# Altium PCB ProPrj_HTXStudio_OneHanded_Keyboard(1).PcbDoc (part 5 of 11)
Units mm, origin at the board's own origin, x right, y up, seen from the top; angles counter-clockwise.
Board outline 152.4 x 101.6 mm, 20 copper layers (F.Cu, F.Mask, B.Cu, B.Mask, In1.Cu, F.SilkS, In2.Cu, B.SilkS, F.Adhes, B.Adhes, F.Paste, B.Paste, Dwgs.User, Cmts.User, Eco1.User, Eco2.User, Edge.Cuts, Margin, B.CrtYd, F.CrtYd); 269 components, 0 nets, 747 pads, 1168 vias.
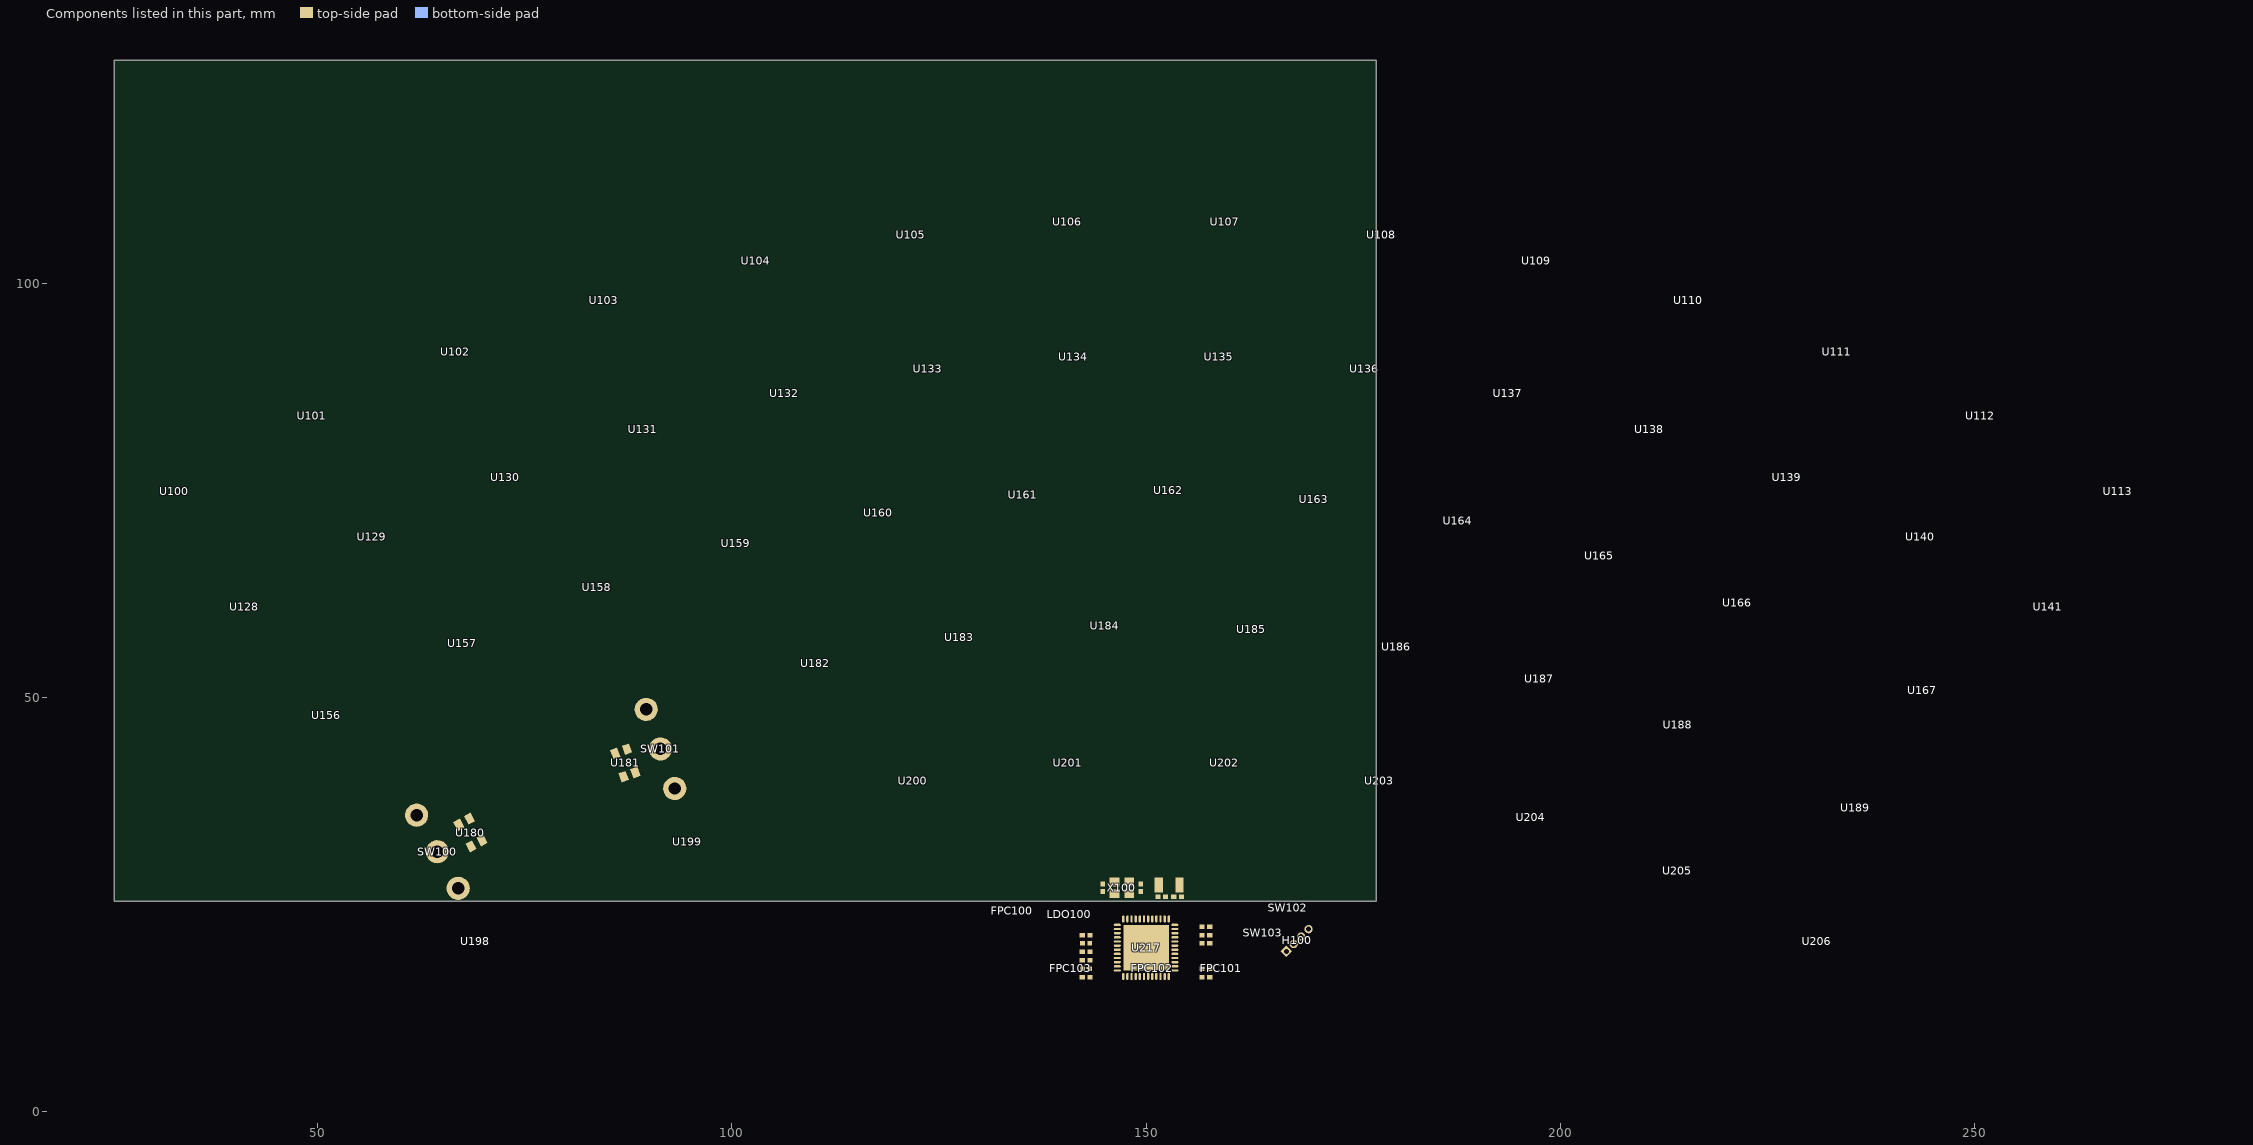
[diagram p17: the components of this part, seen from the top]

## Design rules (kind name [scope] priority, off if disabled: settings) (continued)
PolygonConnect Polygon_B.Cu--90_ConnectRelief90 [IsNamedPolygon('B.Cu--90') vs (IsThruPin or IsSMTPin) and (PadShape_AllLayers <> 'Round')] p804: connectstyle=Relief reliefconductorwidth=0.254 reliefentries=4 polygonreliefangle="90 Angle" airgapwidth=0.254
PolygonConnect Polygon_B.Cu--89_ConnectDirect [IsNamedPolygon('B.Cu--89') vs IsVia] p805: connectstyle=Direct reliefconductorwidth=0.254 reliefentries=4 polygonreliefangle="90 Angle" airgapwidth=0.254
PolygonConnect Polygon_B.Cu--89_ConnectRelief45 [IsNamedPolygon('B.Cu--89') vs (IsThruPin or IsSMTPin) and (PadShape_AllLayers = 'Round')] p806: connectstyle=Relief reliefconductorwidth=0.254 reliefentries=4 polygonreliefangle="45 Angle" airgapwidth=0.254
PolygonConnect Polygon_B.Cu--89_ConnectRelief90 [IsNamedPolygon('B.Cu--89') vs (IsThruPin or IsSMTPin) and (PadShape_AllLayers <> 'Round')] p807: connectstyle=Relief reliefconductorwidth=0.254 reliefentries=4 polygonreliefangle="90 Angle" airgapwidth=0.254
PolygonConnect Polygon_B.Cu--88_ConnectDirect [IsNamedPolygon('B.Cu--88') vs IsVia] p808: connectstyle=Direct reliefconductorwidth=0.254 reliefentries=4 polygonreliefangle="90 Angle" airgapwidth=0.254
PolygonConnect Polygon_B.Cu--88_ConnectRelief45 [IsNamedPolygon('B.Cu--88') vs (IsThruPin or IsSMTPin) and (PadShape_AllLayers = 'Round')] p809: connectstyle=Relief reliefconductorwidth=0.254 reliefentries=4 polygonreliefangle="45 Angle" airgapwidth=0.254
PolygonConnect Polygon_B.Cu--88_ConnectRelief90 [IsNamedPolygon('B.Cu--88') vs (IsThruPin or IsSMTPin) and (PadShape_AllLayers <> 'Round')] p810: connectstyle=Relief reliefconductorwidth=0.254 reliefentries=4 polygonreliefangle="90 Angle" airgapwidth=0.254
PolygonConnect Polygon_B.Cu--87_ConnectDirect [IsNamedPolygon('B.Cu--87') vs IsVia] p811: connectstyle=Direct reliefconductorwidth=0.254 reliefentries=4 polygonreliefangle="90 Angle" airgapwidth=0.254
PolygonConnect Polygon_B.Cu--87_ConnectRelief45 [IsNamedPolygon('B.Cu--87') vs (IsThruPin or IsSMTPin) and (PadShape_AllLayers = 'Round')] p812: connectstyle=Relief reliefconductorwidth=0.254 reliefentries=4 polygonreliefangle="45 Angle" airgapwidth=0.254
PolygonConnect Polygon_B.Cu--87_ConnectRelief90 [IsNamedPolygon('B.Cu--87') vs (IsThruPin or IsSMTPin) and (PadShape_AllLayers <> 'Round')] p813: connectstyle=Relief reliefconductorwidth=0.254 reliefentries=4 polygonreliefangle="90 Angle" airgapwidth=0.254
PolygonConnect Polygon_B.Cu--86_ConnectDirect [IsNamedPolygon('B.Cu--86') vs IsVia] p814: connectstyle=Direct reliefconductorwidth=0.254 reliefentries=4 polygonreliefangle="90 Angle" airgapwidth=0.254
PolygonConnect Polygon_B.Cu--86_ConnectRelief45 [IsNamedPolygon('B.Cu--86') vs (IsThruPin or IsSMTPin) and (PadShape_AllLayers = 'Round')] p815: connectstyle=Relief reliefconductorwidth=0.254 reliefentries=4 polygonreliefangle="45 Angle" airgapwidth=0.254
PolygonConnect Polygon_B.Cu--86_ConnectRelief90 [IsNamedPolygon('B.Cu--86') vs (IsThruPin or IsSMTPin) and (PadShape_AllLayers <> 'Round')] p816: connectstyle=Relief reliefconductorwidth=0.254 reliefentries=4 polygonreliefangle="90 Angle" airgapwidth=0.254
PolygonConnect Polygon_B.Cu--85_ConnectDirect [IsNamedPolygon('B.Cu--85') vs IsVia] p817: connectstyle=Direct reliefconductorwidth=0.254 reliefentries=4 polygonreliefangle="90 Angle" airgapwidth=0.254
PolygonConnect Polygon_B.Cu--85_ConnectRelief45 [IsNamedPolygon('B.Cu--85') vs (IsThruPin or IsSMTPin) and (PadShape_AllLayers = 'Round')] p818: connectstyle=Relief reliefconductorwidth=0.254 reliefentries=4 polygonreliefangle="45 Angle" airgapwidth=0.254
PolygonConnect Polygon_B.Cu--85_ConnectRelief90 [IsNamedPolygon('B.Cu--85') vs (IsThruPin or IsSMTPin) and (PadShape_AllLayers <> 'Round')] p819: connectstyle=Relief reliefconductorwidth=0.254 reliefentries=4 polygonreliefangle="90 Angle" airgapwidth=0.254
PolygonConnect Polygon_B.Cu--84_ConnectDirect [IsNamedPolygon('B.Cu--84') vs IsVia] p820: connectstyle=Direct reliefconductorwidth=0.254 reliefentries=4 polygonreliefangle="90 Angle" airgapwidth=0.254
PolygonConnect Polygon_B.Cu--84_ConnectRelief45 [IsNamedPolygon('B.Cu--84') vs (IsThruPin or IsSMTPin) and (PadShape_AllLayers = 'Round')] p821: connectstyle=Relief reliefconductorwidth=0.254 reliefentries=4 polygonreliefangle="45 Angle" airgapwidth=0.254
PolygonConnect Polygon_B.Cu--84_ConnectRelief90 [IsNamedPolygon('B.Cu--84') vs (IsThruPin or IsSMTPin) and (PadShape_AllLayers <> 'Round')] p822: connectstyle=Relief reliefconductorwidth=0.254 reliefentries=4 polygonreliefangle="90 Angle" airgapwidth=0.254
PolygonConnect Polygon_B.Cu--83_ConnectDirect [IsNamedPolygon('B.Cu--83') vs IsVia] p823: connectstyle=Direct reliefconductorwidth=0.254 reliefentries=4 polygonreliefangle="90 Angle" airgapwidth=0.254
PolygonConnect Polygon_B.Cu--83_ConnectRelief45 [IsNamedPolygon('B.Cu--83') vs (IsThruPin or IsSMTPin) and (PadShape_AllLayers = 'Round')] p824: connectstyle=Relief reliefconductorwidth=0.254 reliefentries=4 polygonreliefangle="45 Angle" airgapwidth=0.254
PolygonConnect Polygon_B.Cu--83_ConnectRelief90 [IsNamedPolygon('B.Cu--83') vs (IsThruPin or IsSMTPin) and (PadShape_AllLayers <> 'Round')] p825: connectstyle=Relief reliefconductorwidth=0.254 reliefentries=4 polygonreliefangle="90 Angle" airgapwidth=0.254
PolygonConnect Polygon_B.Cu--82_ConnectDirect [IsNamedPolygon('B.Cu--82') vs IsVia] p826: connectstyle=Direct reliefconductorwidth=0.254 reliefentries=4 polygonreliefangle="90 Angle" airgapwidth=0.254
PolygonConnect Polygon_B.Cu--82_ConnectRelief45 [IsNamedPolygon('B.Cu--82') vs (IsThruPin or IsSMTPin) and (PadShape_AllLayers = 'Round')] p827: connectstyle=Relief reliefconductorwidth=0.254 reliefentries=4 polygonreliefangle="45 Angle" airgapwidth=0.254
PolygonConnect Polygon_B.Cu--82_ConnectRelief90 [IsNamedPolygon('B.Cu--82') vs (IsThruPin or IsSMTPin) and (PadShape_AllLayers <> 'Round')] p828: connectstyle=Relief reliefconductorwidth=0.254 reliefentries=4 polygonreliefangle="90 Angle" airgapwidth=0.254
PolygonConnect Polygon_B.Cu--81_ConnectDirect [IsNamedPolygon('B.Cu--81') vs IsVia] p829: connectstyle=Direct reliefconductorwidth=0.254 reliefentries=4 polygonreliefangle="90 Angle" airgapwidth=0.254
PolygonConnect Polygon_B.Cu--81_ConnectRelief45 [IsNamedPolygon('B.Cu--81') vs (IsThruPin or IsSMTPin) and (PadShape_AllLayers = 'Round')] p830: connectstyle=Relief reliefconductorwidth=0.254 reliefentries=4 polygonreliefangle="45 Angle" airgapwidth=0.254
PolygonConnect Polygon_B.Cu--81_ConnectRelief90 [IsNamedPolygon('B.Cu--81') vs (IsThruPin or IsSMTPin) and (PadShape_AllLayers <> 'Round')] p831: connectstyle=Relief reliefconductorwidth=0.254 reliefentries=4 polygonreliefangle="90 Angle" airgapwidth=0.254
PolygonConnect Polygon_B.Cu--80_ConnectDirect [IsNamedPolygon('B.Cu--80') vs IsVia] p832: connectstyle=Direct reliefconductorwidth=0.254 reliefentries=4 polygonreliefangle="90 Angle" airgapwidth=0.254
PolygonConnect Polygon_B.Cu--80_ConnectRelief45 [IsNamedPolygon('B.Cu--80') vs (IsThruPin or IsSMTPin) and (PadShape_AllLayers = 'Round')] p833: connectstyle=Relief reliefconductorwidth=0.254 reliefentries=4 polygonreliefangle="45 Angle" airgapwidth=0.254
PolygonConnect Polygon_B.Cu--80_ConnectRelief90 [IsNamedPolygon('B.Cu--80') vs (IsThruPin or IsSMTPin) and (PadShape_AllLayers <> 'Round')] p834: connectstyle=Relief reliefconductorwidth=0.254 reliefentries=4 polygonreliefangle="90 Angle" airgapwidth=0.254
PolygonConnect Polygon_B.Cu--79_ConnectDirect [IsNamedPolygon('B.Cu--79') vs IsVia] p835: connectstyle=Direct reliefconductorwidth=0.254 reliefentries=4 polygonreliefangle="90 Angle" airgapwidth=0.254
PolygonConnect Polygon_B.Cu--79_ConnectRelief45 [IsNamedPolygon('B.Cu--79') vs (IsThruPin or IsSMTPin) and (PadShape_AllLayers = 'Round')] p836: connectstyle=Relief reliefconductorwidth=0.254 reliefentries=4 polygonreliefangle="45 Angle" airgapwidth=0.254
PolygonConnect Polygon_B.Cu--79_ConnectRelief90 [IsNamedPolygon('B.Cu--79') vs (IsThruPin or IsSMTPin) and (PadShape_AllLayers <> 'Round')] p837: connectstyle=Relief reliefconductorwidth=0.254 reliefentries=4 polygonreliefangle="90 Angle" airgapwidth=0.254
PolygonConnect Polygon_B.Cu--78_ConnectDirect [IsNamedPolygon('B.Cu--78') vs IsVia] p838: connectstyle=Direct reliefconductorwidth=0.254 reliefentries=4 polygonreliefangle="90 Angle" airgapwidth=0.254
PolygonConnect Polygon_B.Cu--78_ConnectRelief45 [IsNamedPolygon('B.Cu--78') vs (IsThruPin or IsSMTPin) and (PadShape_AllLayers = 'Round')] p839: connectstyle=Relief reliefconductorwidth=0.254 reliefentries=4 polygonreliefangle="45 Angle" airgapwidth=0.254
PolygonConnect Polygon_B.Cu--78_ConnectRelief90 [IsNamedPolygon('B.Cu--78') vs (IsThruPin or IsSMTPin) and (PadShape_AllLayers <> 'Round')] p840: connectstyle=Relief reliefconductorwidth=0.254 reliefentries=4 polygonreliefangle="90 Angle" airgapwidth=0.254
PolygonConnect Polygon_B.Cu--77_ConnectDirect [IsNamedPolygon('B.Cu--77') vs IsVia] p841: connectstyle=Direct reliefconductorwidth=0.254 reliefentries=4 polygonreliefangle="90 Angle" airgapwidth=0.254
PolygonConnect Polygon_B.Cu--77_ConnectRelief45 [IsNamedPolygon('B.Cu--77') vs (IsThruPin or IsSMTPin) and (PadShape_AllLayers = 'Round')] p842: connectstyle=Relief reliefconductorwidth=0.254 reliefentries=4 polygonreliefangle="45 Angle" airgapwidth=0.254
PolygonConnect Polygon_B.Cu--77_ConnectRelief90 [IsNamedPolygon('B.Cu--77') vs (IsThruPin or IsSMTPin) and (PadShape_AllLayers <> 'Round')] p843: connectstyle=Relief reliefconductorwidth=0.254 reliefentries=4 polygonreliefangle="90 Angle" airgapwidth=0.254
PolygonConnect Polygon_B.Cu--76_ConnectDirect [IsNamedPolygon('B.Cu--76') vs IsVia] p844: connectstyle=Direct reliefconductorwidth=0.254 reliefentries=4 polygonreliefangle="90 Angle" airgapwidth=0.254
PolygonConnect Polygon_B.Cu--76_ConnectRelief45 [IsNamedPolygon('B.Cu--76') vs (IsThruPin or IsSMTPin) and (PadShape_AllLayers = 'Round')] p845: connectstyle=Relief reliefconductorwidth=0.254 reliefentries=4 polygonreliefangle="45 Angle" airgapwidth=0.254
PolygonConnect Polygon_B.Cu--76_ConnectRelief90 [IsNamedPolygon('B.Cu--76') vs (IsThruPin or IsSMTPin) and (PadShape_AllLayers <> 'Round')] p846: connectstyle=Relief reliefconductorwidth=0.254 reliefentries=4 polygonreliefangle="90 Angle" airgapwidth=0.254
PolygonConnect Polygon_B.Cu--75_ConnectDirect [IsNamedPolygon('B.Cu--75') vs IsVia] p847: connectstyle=Direct reliefconductorwidth=0.254 reliefentries=4 polygonreliefangle="90 Angle" airgapwidth=0.254
PolygonConnect Polygon_B.Cu--75_ConnectRelief45 [IsNamedPolygon('B.Cu--75') vs (IsThruPin or IsSMTPin) and (PadShape_AllLayers = 'Round')] p848: connectstyle=Relief reliefconductorwidth=0.254 reliefentries=4 polygonreliefangle="45 Angle" airgapwidth=0.254
PolygonConnect Polygon_B.Cu--75_ConnectRelief90 [IsNamedPolygon('B.Cu--75') vs (IsThruPin or IsSMTPin) and (PadShape_AllLayers <> 'Round')] p849: connectstyle=Relief reliefconductorwidth=0.254 reliefentries=4 polygonreliefangle="90 Angle" airgapwidth=0.254
PolygonConnect Polygon_B.Cu--74_ConnectDirect [IsNamedPolygon('B.Cu--74') vs IsVia] p850: connectstyle=Direct reliefconductorwidth=0.254 reliefentries=4 polygonreliefangle="90 Angle" airgapwidth=0.254
PolygonConnect Polygon_B.Cu--74_ConnectRelief45 [IsNamedPolygon('B.Cu--74') vs (IsThruPin or IsSMTPin) and (PadShape_AllLayers = 'Round')] p851: connectstyle=Relief reliefconductorwidth=0.254 reliefentries=4 polygonreliefangle="45 Angle" airgapwidth=0.254
PolygonConnect Polygon_B.Cu--74_ConnectRelief90 [IsNamedPolygon('B.Cu--74') vs (IsThruPin or IsSMTPin) and (PadShape_AllLayers <> 'Round')] p852: connectstyle=Relief reliefconductorwidth=0.254 reliefentries=4 polygonreliefangle="90 Angle" airgapwidth=0.254
PolygonConnect Polygon_B.Cu--73_ConnectDirect [IsNamedPolygon('B.Cu--73') vs IsVia] p853: connectstyle=Direct reliefconductorwidth=0.254 reliefentries=4 polygonreliefangle="90 Angle" airgapwidth=0.254
PolygonConnect Polygon_B.Cu--73_ConnectRelief45 [IsNamedPolygon('B.Cu--73') vs (IsThruPin or IsSMTPin) and (PadShape_AllLayers = 'Round')] p854: connectstyle=Relief reliefconductorwidth=0.254 reliefentries=4 polygonreliefangle="45 Angle" airgapwidth=0.254
PolygonConnect Polygon_B.Cu--73_ConnectRelief90 [IsNamedPolygon('B.Cu--73') vs (IsThruPin or IsSMTPin) and (PadShape_AllLayers <> 'Round')] p855: connectstyle=Relief reliefconductorwidth=0.254 reliefentries=4 polygonreliefangle="90 Angle" airgapwidth=0.254
PolygonConnect Polygon_B.Cu--72_ConnectDirect [IsNamedPolygon('B.Cu--72') vs IsVia] p856: connectstyle=Direct reliefconductorwidth=0.254 reliefentries=4 polygonreliefangle="90 Angle" airgapwidth=0.254
PolygonConnect Polygon_B.Cu--72_ConnectRelief45 [IsNamedPolygon('B.Cu--72') vs (IsThruPin or IsSMTPin) and (PadShape_AllLayers = 'Round')] p857: connectstyle=Relief reliefconductorwidth=0.254 reliefentries=4 polygonreliefangle="45 Angle" airgapwidth=0.254
PolygonConnect Polygon_B.Cu--72_ConnectRelief90 [IsNamedPolygon('B.Cu--72') vs (IsThruPin or IsSMTPin) and (PadShape_AllLayers <> 'Round')] p858: connectstyle=Relief reliefconductorwidth=0.254 reliefentries=4 polygonreliefangle="90 Angle" airgapwidth=0.254
PolygonConnect Polygon_B.Cu--71_ConnectDirect [IsNamedPolygon('B.Cu--71') vs IsVia] p859: connectstyle=Direct reliefconductorwidth=0.254 reliefentries=4 polygonreliefangle="90 Angle" airgapwidth=0.254
PolygonConnect Polygon_B.Cu--71_ConnectRelief45 [IsNamedPolygon('B.Cu--71') vs (IsThruPin or IsSMTPin) and (PadShape_AllLayers = 'Round')] p860: connectstyle=Relief reliefconductorwidth=0.254 reliefentries=4 polygonreliefangle="45 Angle" airgapwidth=0.254
PolygonConnect Polygon_B.Cu--71_ConnectRelief90 [IsNamedPolygon('B.Cu--71') vs (IsThruPin or IsSMTPin) and (PadShape_AllLayers <> 'Round')] p861: connectstyle=Relief reliefconductorwidth=0.254 reliefentries=4 polygonreliefangle="90 Angle" airgapwidth=0.254
PolygonConnect Polygon_B.Cu--70_ConnectDirect [IsNamedPolygon('B.Cu--70') vs IsVia] p862: connectstyle=Direct reliefconductorwidth=0.254 reliefentries=4 polygonreliefangle="90 Angle" airgapwidth=0.254
PolygonConnect Polygon_B.Cu--70_ConnectRelief45 [IsNamedPolygon('B.Cu--70') vs (IsThruPin or IsSMTPin) and (PadShape_AllLayers = 'Round')] p863: connectstyle=Relief reliefconductorwidth=0.254 reliefentries=4 polygonreliefangle="45 Angle" airgapwidth=0.254
PolygonConnect Polygon_B.Cu--70_ConnectRelief90 [IsNamedPolygon('B.Cu--70') vs (IsThruPin or IsSMTPin) and (PadShape_AllLayers <> 'Round')] p864: connectstyle=Relief reliefconductorwidth=0.254 reliefentries=4 polygonreliefangle="90 Angle" airgapwidth=0.254
PolygonConnect Polygon_B.Cu--69_ConnectDirect [IsNamedPolygon('B.Cu--69') vs IsVia] p865: connectstyle=Direct reliefconductorwidth=0.254 reliefentries=4 polygonreliefangle="90 Angle" airgapwidth=0.254
PolygonConnect Polygon_B.Cu--69_ConnectRelief45 [IsNamedPolygon('B.Cu--69') vs (IsThruPin or IsSMTPin) and (PadShape_AllLayers = 'Round')] p866: connectstyle=Relief reliefconductorwidth=0.254 reliefentries=4 polygonreliefangle="45 Angle" airgapwidth=0.254
PolygonConnect Polygon_B.Cu--69_ConnectRelief90 [IsNamedPolygon('B.Cu--69') vs (IsThruPin or IsSMTPin) and (PadShape_AllLayers <> 'Round')] p867: connectstyle=Relief reliefconductorwidth=0.254 reliefentries=4 polygonreliefangle="90 Angle" airgapwidth=0.254
PolygonConnect Polygon_B.Cu--68_ConnectDirect [IsNamedPolygon('B.Cu--68') vs IsVia] p868: connectstyle=Direct reliefconductorwidth=0.254 reliefentries=4 polygonreliefangle="90 Angle" airgapwidth=0.254
PolygonConnect Polygon_B.Cu--68_ConnectRelief45 [IsNamedPolygon('B.Cu--68') vs (IsThruPin or IsSMTPin) and (PadShape_AllLayers = 'Round')] p869: connectstyle=Relief reliefconductorwidth=0.254 reliefentries=4 polygonreliefangle="45 Angle" airgapwidth=0.254
PolygonConnect Polygon_B.Cu--68_ConnectRelief90 [IsNamedPolygon('B.Cu--68') vs (IsThruPin or IsSMTPin) and (PadShape_AllLayers <> 'Round')] p870: connectstyle=Relief reliefconductorwidth=0.254 reliefentries=4 polygonreliefangle="90 Angle" airgapwidth=0.254
PolygonConnect Polygon_B.Cu--67_ConnectDirect [IsNamedPolygon('B.Cu--67') vs IsVia] p871: connectstyle=Direct reliefconductorwidth=0.254 reliefentries=4 polygonreliefangle="90 Angle" airgapwidth=0.254
PolygonConnect Polygon_B.Cu--67_ConnectRelief45 [IsNamedPolygon('B.Cu--67') vs (IsThruPin or IsSMTPin) and (PadShape_AllLayers = 'Round')] p872: connectstyle=Relief reliefconductorwidth=0.254 reliefentries=4 polygonreliefangle="45 Angle" airgapwidth=0.254
PolygonConnect Polygon_B.Cu--67_ConnectRelief90 [IsNamedPolygon('B.Cu--67') vs (IsThruPin or IsSMTPin) and (PadShape_AllLayers <> 'Round')] p873: connectstyle=Relief reliefconductorwidth=0.254 reliefentries=4 polygonreliefangle="90 Angle" airgapwidth=0.254
PolygonConnect Polygon_B.Cu--66_ConnectDirect [IsNamedPolygon('B.Cu--66') vs IsVia] p874: connectstyle=Direct reliefconductorwidth=0.254 reliefentries=4 polygonreliefangle="90 Angle" airgapwidth=0.254
PolygonConnect Polygon_B.Cu--66_ConnectRelief45 [IsNamedPolygon('B.Cu--66') vs (IsThruPin or IsSMTPin) and (PadShape_AllLayers = 'Round')] p875: connectstyle=Relief reliefconductorwidth=0.254 reliefentries=4 polygonreliefangle="45 Angle" airgapwidth=0.254
PolygonConnect Polygon_B.Cu--66_ConnectRelief90 [IsNamedPolygon('B.Cu--66') vs (IsThruPin or IsSMTPin) and (PadShape_AllLayers <> 'Round')] p876: connectstyle=Relief reliefconductorwidth=0.254 reliefentries=4 polygonreliefangle="90 Angle" airgapwidth=0.254
PolygonConnect Polygon_B.Cu--65_ConnectDirect [IsNamedPolygon('B.Cu--65') vs IsVia] p877: connectstyle=Direct reliefconductorwidth=0.254 reliefentries=4 polygonreliefangle="90 Angle" airgapwidth=0.254
PolygonConnect Polygon_B.Cu--65_ConnectRelief45 [IsNamedPolygon('B.Cu--65') vs (IsThruPin or IsSMTPin) and (PadShape_AllLayers = 'Round')] p878: connectstyle=Relief reliefconductorwidth=0.254 reliefentries=4 polygonreliefangle="45 Angle" airgapwidth=0.254
PolygonConnect Polygon_B.Cu--65_ConnectRelief90 [IsNamedPolygon('B.Cu--65') vs (IsThruPin or IsSMTPin) and (PadShape_AllLayers <> 'Round')] p879: connectstyle=Relief reliefconductorwidth=0.254 reliefentries=4 polygonreliefangle="90 Angle" airgapwidth=0.254
PolygonConnect Polygon_B.Cu--64_ConnectDirect [IsNamedPolygon('B.Cu--64') vs IsVia] p880: connectstyle=Direct reliefconductorwidth=0.254 reliefentries=4 polygonreliefangle="90 Angle" airgapwidth=0.254
PolygonConnect Polygon_B.Cu--64_ConnectRelief45 [IsNamedPolygon('B.Cu--64') vs (IsThruPin or IsSMTPin) and (PadShape_AllLayers = 'Round')] p881: connectstyle=Relief reliefconductorwidth=0.254 reliefentries=4 polygonreliefangle="45 Angle" airgapwidth=0.254
PolygonConnect Polygon_B.Cu--64_ConnectRelief90 [IsNamedPolygon('B.Cu--64') vs (IsThruPin or IsSMTPin) and (PadShape_AllLayers <> 'Round')] p882: connectstyle=Relief reliefconductorwidth=0.254 reliefentries=4 polygonreliefangle="90 Angle" airgapwidth=0.254
PolygonConnect Polygon_B.Cu--63_ConnectDirect [IsNamedPolygon('B.Cu--63') vs IsVia] p883: connectstyle=Direct reliefconductorwidth=0.254 reliefentries=4 polygonreliefangle="90 Angle" airgapwidth=0.254
PolygonConnect Polygon_B.Cu--63_ConnectRelief45 [IsNamedPolygon('B.Cu--63') vs (IsThruPin or IsSMTPin) and (PadShape_AllLayers = 'Round')] p884: connectstyle=Relief reliefconductorwidth=0.254 reliefentries=4 polygonreliefangle="45 Angle" airgapwidth=0.254
PolygonConnect Polygon_B.Cu--63_ConnectRelief90 [IsNamedPolygon('B.Cu--63') vs (IsThruPin or IsSMTPin) and (PadShape_AllLayers <> 'Round')] p885: connectstyle=Relief reliefconductorwidth=0.254 reliefentries=4 polygonreliefangle="90 Angle" airgapwidth=0.254
PolygonConnect Polygon_B.Cu--62_ConnectDirect [IsNamedPolygon('B.Cu--62') vs IsVia] p886: connectstyle=Direct reliefconductorwidth=0.254 reliefentries=4 polygonreliefangle="90 Angle" airgapwidth=0.254
PolygonConnect Polygon_B.Cu--62_ConnectRelief45 [IsNamedPolygon('B.Cu--62') vs (IsThruPin or IsSMTPin) and (PadShape_AllLayers = 'Round')] p887: connectstyle=Relief reliefconductorwidth=0.254 reliefentries=4 polygonreliefangle="45 Angle" airgapwidth=0.254
PolygonConnect Polygon_B.Cu--62_ConnectRelief90 [IsNamedPolygon('B.Cu--62') vs (IsThruPin or IsSMTPin) and (PadShape_AllLayers <> 'Round')] p888: connectstyle=Relief reliefconductorwidth=0.254 reliefentries=4 polygonreliefangle="90 Angle" airgapwidth=0.254
PolygonConnect Polygon_B.Cu--61_ConnectDirect [IsNamedPolygon('B.Cu--61') vs IsVia] p889: connectstyle=Direct reliefconductorwidth=0.254 reliefentries=4 polygonreliefangle="90 Angle" airgapwidth=0.254
PolygonConnect Polygon_B.Cu--61_ConnectRelief45 [IsNamedPolygon('B.Cu--61') vs (IsThruPin or IsSMTPin) and (PadShape_AllLayers = 'Round')] p890: connectstyle=Relief reliefconductorwidth=0.254 reliefentries=4 polygonreliefangle="45 Angle" airgapwidth=0.254
PolygonConnect Polygon_B.Cu--61_ConnectRelief90 [IsNamedPolygon('B.Cu--61') vs (IsThruPin or IsSMTPin) and (PadShape_AllLayers <> 'Round')] p891: connectstyle=Relief reliefconductorwidth=0.254 reliefentries=4 polygonreliefangle="90 Angle" airgapwidth=0.254
PolygonConnect Polygon_B.Cu--60_ConnectDirect [IsNamedPolygon('B.Cu--60') vs IsVia] p892: connectstyle=Direct reliefconductorwidth=0.254 reliefentries=4 polygonreliefangle="90 Angle" airgapwidth=0.254
PolygonConnect Polygon_B.Cu--60_ConnectRelief45 [IsNamedPolygon('B.Cu--60') vs (IsThruPin or IsSMTPin) and (PadShape_AllLayers = 'Round')] p893: connectstyle=Relief reliefconductorwidth=0.254 reliefentries=4 polygonreliefangle="45 Angle" airgapwidth=0.254
PolygonConnect Polygon_B.Cu--60_ConnectRelief90 [IsNamedPolygon('B.Cu--60') vs (IsThruPin or IsSMTPin) and (PadShape_AllLayers <> 'Round')] p894: connectstyle=Relief reliefconductorwidth=0.254 reliefentries=4 polygonreliefangle="90 Angle" airgapwidth=0.254
PolygonConnect Polygon_B.Cu--59_ConnectDirect [IsNamedPolygon('B.Cu--59') vs IsVia] p895: connectstyle=Direct reliefconductorwidth=0.254 reliefentries=4 polygonreliefangle="90 Angle" airgapwidth=0.254
PolygonConnect Polygon_B.Cu--59_ConnectRelief45 [IsNamedPolygon('B.Cu--59') vs (IsThruPin or IsSMTPin) and (PadShape_AllLayers = 'Round')] p896: connectstyle=Relief reliefconductorwidth=0.254 reliefentries=4 polygonreliefangle="45 Angle" airgapwidth=0.254
PolygonConnect Polygon_B.Cu--59_ConnectRelief90 [IsNamedPolygon('B.Cu--59') vs (IsThruPin or IsSMTPin) and (PadShape_AllLayers <> 'Round')] p897: connectstyle=Relief reliefconductorwidth=0.254 reliefentries=4 polygonreliefangle="90 Angle" airgapwidth=0.254
PolygonConnect Polygon_B.Cu--58_ConnectDirect [IsNamedPolygon('B.Cu--58') vs IsVia] p898: connectstyle=Direct reliefconductorwidth=0.254 reliefentries=4 polygonreliefangle="90 Angle" airgapwidth=0.254
PolygonConnect Polygon_B.Cu--58_ConnectRelief45 [IsNamedPolygon('B.Cu--58') vs (IsThruPin or IsSMTPin) and (PadShape_AllLayers = 'Round')] p899: connectstyle=Relief reliefconductorwidth=0.254 reliefentries=4 polygonreliefangle="45 Angle" airgapwidth=0.254
PolygonConnect Polygon_B.Cu--58_ConnectRelief90 [IsNamedPolygon('B.Cu--58') vs (IsThruPin or IsSMTPin) and (PadShape_AllLayers <> 'Round')] p900: connectstyle=Relief reliefconductorwidth=0.254 reliefentries=4 polygonreliefangle="90 Angle" airgapwidth=0.254
PolygonConnect Polygon_B.Cu--57_ConnectDirect [IsNamedPolygon('B.Cu--57') vs IsVia] p901: connectstyle=Direct reliefconductorwidth=0.254 reliefentries=4 polygonreliefangle="90 Angle" airgapwidth=0.254
PolygonConnect Polygon_B.Cu--57_ConnectRelief45 [IsNamedPolygon('B.Cu--57') vs (IsThruPin or IsSMTPin) and (PadShape_AllLayers = 'Round')] p902: connectstyle=Relief reliefconductorwidth=0.254 reliefentries=4 polygonreliefangle="45 Angle" airgapwidth=0.254
PolygonConnect Polygon_B.Cu--57_ConnectRelief90 [IsNamedPolygon('B.Cu--57') vs (IsThruPin or IsSMTPin) and (PadShape_AllLayers <> 'Round')] p903: connectstyle=Relief reliefconductorwidth=0.254 reliefentries=4 polygonreliefangle="90 Angle" airgapwidth=0.254
PolygonConnect Polygon_B.Cu--56_ConnectDirect [IsNamedPolygon('B.Cu--56') vs IsVia] p904: connectstyle=Direct reliefconductorwidth=0.254 reliefentries=4 polygonreliefangle="90 Angle" airgapwidth=0.254
PolygonConnect Polygon_B.Cu--56_ConnectRelief45 [IsNamedPolygon('B.Cu--56') vs (IsThruPin or IsSMTPin) and (PadShape_AllLayers = 'Round')] p905: connectstyle=Relief reliefconductorwidth=0.254 reliefentries=4 polygonreliefangle="45 Angle" airgapwidth=0.254
PolygonConnect Polygon_B.Cu--56_ConnectRelief90 [IsNamedPolygon('B.Cu--56') vs (IsThruPin or IsSMTPin) and (PadShape_AllLayers <> 'Round')] p906: connectstyle=Relief reliefconductorwidth=0.254 reliefentries=4 polygonreliefangle="90 Angle" airgapwidth=0.254
PolygonConnect Polygon_B.Cu--55_ConnectDirect [IsNamedPolygon('B.Cu--55') vs IsVia] p907: connectstyle=Direct reliefconductorwidth=0.254 reliefentries=4 polygonreliefangle="90 Angle" airgapwidth=0.254
PolygonConnect Polygon_B.Cu--55_ConnectRelief45 [IsNamedPolygon('B.Cu--55') vs (IsThruPin or IsSMTPin) and (PadShape_AllLayers = 'Round')] p908: connectstyle=Relief reliefconductorwidth=0.254 reliefentries=4 polygonreliefangle="45 Angle" airgapwidth=0.254
PolygonConnect Polygon_B.Cu--55_ConnectRelief90 [IsNamedPolygon('B.Cu--55') vs (IsThruPin or IsSMTPin) and (PadShape_AllLayers <> 'Round')] p909: connectstyle=Relief reliefconductorwidth=0.254 reliefentries=4 polygonreliefangle="90 Angle" airgapwidth=0.254
PolygonConnect Polygon_B.Cu--54_ConnectDirect [IsNamedPolygon('B.Cu--54') vs IsVia] p910: connectstyle=Direct reliefconductorwidth=0.254 reliefentries=4 polygonreliefangle="90 Angle" airgapwidth=0.254
PolygonConnect Polygon_B.Cu--54_ConnectRelief45 [IsNamedPolygon('B.Cu--54') vs (IsThruPin or IsSMTPin) and (PadShape_AllLayers = 'Round')] p911: connectstyle=Relief reliefconductorwidth=0.254 reliefentries=4 polygonreliefangle="45 Angle" airgapwidth=0.254
PolygonConnect Polygon_B.Cu--54_ConnectRelief90 [IsNamedPolygon('B.Cu--54') vs (IsThruPin or IsSMTPin) and (PadShape_AllLayers <> 'Round')] p912: connectstyle=Relief reliefconductorwidth=0.254 reliefentries=4 polygonreliefangle="90 Angle" airgapwidth=0.254
PolygonConnect Polygon_B.Cu--53_ConnectDirect [IsNamedPolygon('B.Cu--53') vs IsVia] p913: connectstyle=Direct reliefconductorwidth=0.254 reliefentries=4 polygonreliefangle="90 Angle" airgapwidth=0.254
PolygonConnect Polygon_B.Cu--53_ConnectRelief45 [IsNamedPolygon('B.Cu--53') vs (IsThruPin or IsSMTPin) and (PadShape_AllLayers = 'Round')] p914: connectstyle=Relief reliefconductorwidth=0.254 reliefentries=4 polygonreliefangle="45 Angle" airgapwidth=0.254
PolygonConnect Polygon_B.Cu--53_ConnectRelief90 [IsNamedPolygon('B.Cu--53') vs (IsThruPin or IsSMTPin) and (PadShape_AllLayers <> 'Round')] p915: connectstyle=Relief reliefconductorwidth=0.254 reliefentries=4 polygonreliefangle="90 Angle" airgapwidth=0.254
PolygonConnect Polygon_B.Cu--52_ConnectDirect [IsNamedPolygon('B.Cu--52') vs IsVia] p916: connectstyle=Direct reliefconductorwidth=0.254 reliefentries=4 polygonreliefangle="90 Angle" airgapwidth=0.254
PolygonConnect Polygon_B.Cu--52_ConnectRelief45 [IsNamedPolygon('B.Cu--52') vs (IsThruPin or IsSMTPin) and (PadShape_AllLayers = 'Round')] p917: connectstyle=Relief reliefconductorwidth=0.254 reliefentries=4 polygonreliefangle="45 Angle" airgapwidth=0.254
PolygonConnect Polygon_B.Cu--52_ConnectRelief90 [IsNamedPolygon('B.Cu--52') vs (IsThruPin or IsSMTPin) and (PadShape_AllLayers <> 'Round')] p918: connectstyle=Relief reliefconductorwidth=0.254 reliefentries=4 polygonreliefangle="90 Angle" airgapwidth=0.254
PolygonConnect Polygon_B.Cu--51_ConnectDirect [IsNamedPolygon('B.Cu--51') vs IsVia] p919: connectstyle=Direct reliefconductorwidth=0.254 reliefentries=4 polygonreliefangle="90 Angle" airgapwidth=0.254
PolygonConnect Polygon_B.Cu--51_ConnectRelief45 [IsNamedPolygon('B.Cu--51') vs (IsThruPin or IsSMTPin) and (PadShape_AllLayers = 'Round')] p920: connectstyle=Relief reliefconductorwidth=0.254 reliefentries=4 polygonreliefangle="45 Angle" airgapwidth=0.254
PolygonConnect Polygon_B.Cu--51_ConnectRelief90 [IsNamedPolygon('B.Cu--51') vs (IsThruPin or IsSMTPin) and (PadShape_AllLayers <> 'Round')] p921: connectstyle=Relief reliefconductorwidth=0.254 reliefentries=4 polygonreliefangle="90 Angle" airgapwidth=0.254
PolygonConnect Polygon_B.Cu--50_ConnectDirect [IsNamedPolygon('B.Cu--50') vs IsVia] p922: connectstyle=Direct reliefconductorwidth=0.254 reliefentries=4 polygonreliefangle="90 Angle" airgapwidth=0.254
PolygonConnect Polygon_B.Cu--50_ConnectRelief45 [IsNamedPolygon('B.Cu--50') vs (IsThruPin or IsSMTPin) and (PadShape_AllLayers = 'Round')] p923: connectstyle=Relief reliefconductorwidth=0.254 reliefentries=4 polygonreliefangle="45 Angle" airgapwidth=0.254
PolygonConnect Polygon_B.Cu--50_ConnectRelief90 [IsNamedPolygon('B.Cu--50') vs (IsThruPin or IsSMTPin) and (PadShape_AllLayers <> 'Round')] p924: connectstyle=Relief reliefconductorwidth=0.254 reliefentries=4 polygonreliefangle="90 Angle" airgapwidth=0.254
PolygonConnect Polygon_B.Cu--49_ConnectDirect [IsNamedPolygon('B.Cu--49') vs IsVia] p925: connectstyle=Direct reliefconductorwidth=0.254 reliefentries=4 polygonreliefangle="90 Angle" airgapwidth=0.254
PolygonConnect Polygon_B.Cu--49_ConnectRelief45 [IsNamedPolygon('B.Cu--49') vs (IsThruPin or IsSMTPin) and (PadShape_AllLayers = 'Round')] p926: connectstyle=Relief reliefconductorwidth=0.254 reliefentries=4 polygonreliefangle="45 Angle" airgapwidth=0.254
PolygonConnect Polygon_B.Cu--49_ConnectRelief90 [IsNamedPolygon('B.Cu--49') vs (IsThruPin or IsSMTPin) and (PadShape_AllLayers <> 'Round')] p927: connectstyle=Relief reliefconductorwidth=0.254 reliefentries=4 polygonreliefangle="90 Angle" airgapwidth=0.254
PolygonConnect Polygon_B.Cu--48_ConnectDirect [IsNamedPolygon('B.Cu--48') vs IsVia] p928: connectstyle=Direct reliefconductorwidth=0.254 reliefentries=4 polygonreliefangle="90 Angle" airgapwidth=0.254
PolygonConnect Polygon_B.Cu--48_ConnectRelief45 [IsNamedPolygon('B.Cu--48') vs (IsThruPin or IsSMTPin) and (PadShape_AllLayers = 'Round')] p929: connectstyle=Relief reliefconductorwidth=0.254 reliefentries=4 polygonreliefangle="45 Angle" airgapwidth=0.254
PolygonConnect Polygon_B.Cu--48_ConnectRelief90 [IsNamedPolygon('B.Cu--48') vs (IsThruPin or IsSMTPin) and (PadShape_AllLayers <> 'Round')] p930: connectstyle=Relief reliefconductorwidth=0.254 reliefentries=4 polygonreliefangle="90 Angle" airgapwidth=0.254
PolygonConnect Polygon_B.Cu--47_ConnectDirect [IsNamedPolygon('B.Cu--47') vs IsVia] p931: connectstyle=Direct reliefconductorwidth=0.254 reliefentries=4 polygonreliefangle="90 Angle" airgapwidth=0.254
PolygonConnect Polygon_B.Cu--47_ConnectRelief45 [IsNamedPolygon('B.Cu--47') vs (IsThruPin or IsSMTPin) and (PadShape_AllLayers = 'Round')] p932: connectstyle=Relief reliefconductorwidth=0.254 reliefentries=4 polygonreliefangle="45 Angle" airgapwidth=0.254
PolygonConnect Polygon_B.Cu--47_ConnectRelief90 [IsNamedPolygon('B.Cu--47') vs (IsThruPin or IsSMTPin) and (PadShape_AllLayers <> 'Round')] p933: connectstyle=Relief reliefconductorwidth=0.254 reliefentries=4 polygonreliefangle="90 Angle" airgapwidth=0.254
PolygonConnect Polygon_B.Cu--46_ConnectDirect [IsNamedPolygon('B.Cu--46') vs IsVia] p934: connectstyle=Direct reliefconductorwidth=0.254 reliefentries=4 polygonreliefangle="90 Angle" airgapwidth=0.254
PolygonConnect Polygon_B.Cu--46_ConnectRelief45 [IsNamedPolygon('B.Cu--46') vs (IsThruPin or IsSMTPin) and (PadShape_AllLayers = 'Round')] p935: connectstyle=Relief reliefconductorwidth=0.254 reliefentries=4 polygonreliefangle="45 Angle" airgapwidth=0.254
PolygonConnect Polygon_B.Cu--46_ConnectRelief90 [IsNamedPolygon('B.Cu--46') vs (IsThruPin or IsSMTPin) and (PadShape_AllLayers <> 'Round')] p936: connectstyle=Relief reliefconductorwidth=0.254 reliefentries=4 polygonreliefangle="90 Angle" airgapwidth=0.254
PolygonConnect Polygon_B.Cu--45_ConnectDirect [IsNamedPolygon('B.Cu--45') vs IsVia] p937: connectstyle=Direct reliefconductorwidth=0.254 reliefentries=4 polygonreliefangle="90 Angle" airgapwidth=0.254
PolygonConnect Polygon_B.Cu--45_ConnectRelief45 [IsNamedPolygon('B.Cu--45') vs (IsThruPin or IsSMTPin) and (PadShape_AllLayers = 'Round')] p938: connectstyle=Relief reliefconductorwidth=0.254 reliefentries=4 polygonreliefangle="45 Angle" airgapwidth=0.254
PolygonConnect Polygon_B.Cu--45_ConnectRelief90 [IsNamedPolygon('B.Cu--45') vs (IsThruPin or IsSMTPin) and (PadShape_AllLayers <> 'Round')] p939: connectstyle=Relief reliefconductorwidth=0.254 reliefentries=4 polygonreliefangle="90 Angle" airgapwidth=0.254
PolygonConnect Polygon_B.Cu--44_ConnectDirect [IsNamedPolygon('B.Cu--44') vs IsVia] p940: connectstyle=Direct reliefconductorwidth=0.254 reliefentries=4 polygonreliefangle="90 Angle" airgapwidth=0.254
PolygonConnect Polygon_B.Cu--44_ConnectRelief45 [IsNamedPolygon('B.Cu--44') vs (IsThruPin or IsSMTPin) and (PadShape_AllLayers = 'Round')] p941: connectstyle=Relief reliefconductorwidth=0.254 reliefentries=4 polygonreliefangle="45 Angle" airgapwidth=0.254
PolygonConnect Polygon_B.Cu--44_ConnectRelief90 [IsNamedPolygon('B.Cu--44') vs (IsThruPin or IsSMTPin) and (PadShape_AllLayers <> 'Round')] p942: connectstyle=Relief reliefconductorwidth=0.254 reliefentries=4 polygonreliefangle="90 Angle" airgapwidth=0.254
PolygonConnect Polygon_B.Cu--43_ConnectDirect [IsNamedPolygon('B.Cu--43') vs IsVia] p943: connectstyle=Direct reliefconductorwidth=0.254 reliefentries=4 polygonreliefangle="90 Angle" airgapwidth=0.254
PolygonConnect Polygon_B.Cu--43_ConnectRelief45 [IsNamedPolygon('B.Cu--43') vs (IsThruPin or IsSMTPin) and (PadShape_AllLayers = 'Round')] p944: connectstyle=Relief reliefconductorwidth=0.254 reliefentries=4 polygonreliefangle="45 Angle" airgapwidth=0.254
PolygonConnect Polygon_B.Cu--43_ConnectRelief90 [IsNamedPolygon('B.Cu--43') vs (IsThruPin or IsSMTPin) and (PadShape_AllLayers <> 'Round')] p945: connectstyle=Relief reliefconductorwidth=0.254 reliefentries=4 polygonreliefangle="90 Angle" airgapwidth=0.254
PolygonConnect Polygon_B.Cu--42_ConnectDirect [IsNamedPolygon('B.Cu--42') vs IsVia] p946: connectstyle=Direct reliefconductorwidth=0.254 reliefentries=4 polygonreliefangle="90 Angle" airgapwidth=0.254
PolygonConnect Polygon_B.Cu--42_ConnectRelief45 [IsNamedPolygon('B.Cu--42') vs (IsThruPin or IsSMTPin) and (PadShape_AllLayers = 'Round')] p947: connectstyle=Relief reliefconductorwidth=0.254 reliefentries=4 polygonreliefangle="45 Angle" airgapwidth=0.254
PolygonConnect Polygon_B.Cu--42_ConnectRelief90 [IsNamedPolygon('B.Cu--42') vs (IsThruPin or IsSMTPin) and (PadShape_AllLayers <> 'Round')] p948: connectstyle=Relief reliefconductorwidth=0.254 reliefentries=4 polygonreliefangle="90 Angle" airgapwidth=0.254
PolygonConnect Polygon_B.Cu--41_ConnectDirect [IsNamedPolygon('B.Cu--41') vs IsVia] p949: connectstyle=Direct reliefconductorwidth=0.254 reliefentries=4 polygonreliefangle="90 Angle" airgapwidth=0.254
PolygonConnect Polygon_B.Cu--41_ConnectRelief45 [IsNamedPolygon('B.Cu--41') vs (IsThruPin or IsSMTPin) and (PadShape_AllLayers = 'Round')] p950: connectstyle=Relief reliefconductorwidth=0.254 reliefentries=4 polygonreliefangle="45 Angle" airgapwidth=0.254
PolygonConnect Polygon_B.Cu--41_ConnectRelief90 [IsNamedPolygon('B.Cu--41') vs (IsThruPin or IsSMTPin) and (PadShape_AllLayers <> 'Round')] p951: connectstyle=Relief reliefconductorwidth=0.254 reliefentries=4 polygonreliefangle="90 Angle" airgapwidth=0.254
PolygonConnect Polygon_B.Cu--40_ConnectDirect [IsNamedPolygon('B.Cu--40') vs IsVia] p952: connectstyle=Direct reliefconductorwidth=0.254 reliefentries=4 polygonreliefangle="90 Angle" airgapwidth=0.254
PolygonConnect Polygon_B.Cu--40_ConnectRelief45 [IsNamedPolygon('B.Cu--40') vs (IsThruPin or IsSMTPin) and (PadShape_AllLayers = 'Round')] p953: connectstyle=Relief reliefconductorwidth=0.254 reliefentries=4 polygonreliefangle="45 Angle" airgapwidth=0.254
PolygonConnect Polygon_B.Cu--40_ConnectRelief90 [IsNamedPolygon('B.Cu--40') vs (IsThruPin or IsSMTPin) and (PadShape_AllLayers <> 'Round')] p954: connectstyle=Relief reliefconductorwidth=0.254 reliefentries=4 polygonreliefangle="90 Angle" airgapwidth=0.254
PolygonConnect Polygon_B.Cu--39_ConnectDirect [IsNamedPolygon('B.Cu--39') vs IsVia] p955: connectstyle=Direct reliefconductorwidth=0.254 reliefentries=4 polygonreliefangle="90 Angle" airgapwidth=0.254
PolygonConnect Polygon_B.Cu--39_ConnectRelief45 [IsNamedPolygon('B.Cu--39') vs (IsThruPin or IsSMTPin) and (PadShape_AllLayers = 'Round')] p956: connectstyle=Relief reliefconductorwidth=0.254 reliefentries=4 polygonreliefangle="45 Angle" airgapwidth=0.254
PolygonConnect Polygon_B.Cu--39_ConnectRelief90 [IsNamedPolygon('B.Cu--39') vs (IsThruPin or IsSMTPin) and (PadShape_AllLayers <> 'Round')] p957: connectstyle=Relief reliefconductorwidth=0.254 reliefentries=4 polygonreliefangle="90 Angle" airgapwidth=0.254
PolygonConnect Polygon_B.Cu--38_ConnectDirect [IsNamedPolygon('B.Cu--38') vs IsVia] p958: connectstyle=Direct reliefconductorwidth=0.254 reliefentries=4 polygonreliefangle="90 Angle" airgapwidth=0.254
PolygonConnect Polygon_B.Cu--38_ConnectRelief45 [IsNamedPolygon('B.Cu--38') vs (IsThruPin or IsSMTPin) and (PadShape_AllLayers = 'Round')] p959: connectstyle=Relief reliefconductorwidth=0.254 reliefentries=4 polygonreliefangle="45 Angle" airgapwidth=0.254
PolygonConnect Polygon_B.Cu--38_ConnectRelief90 [IsNamedPolygon('B.Cu--38') vs (IsThruPin or IsSMTPin) and (PadShape_AllLayers <> 'Round')] p960: connectstyle=Relief reliefconductorwidth=0.254 reliefentries=4 polygonreliefangle="90 Angle" airgapwidth=0.254
PolygonConnect Polygon_B.Cu--37_ConnectDirect [IsNamedPolygon('B.Cu--37') vs IsVia] p961: connectstyle=Direct reliefconductorwidth=0.254 reliefentries=4 polygonreliefangle="90 Angle" airgapwidth=0.254
PolygonConnect Polygon_B.Cu--37_ConnectRelief45 [IsNamedPolygon('B.Cu--37') vs (IsThruPin or IsSMTPin) and (PadShape_AllLayers = 'Round')] p962: connectstyle=Relief reliefconductorwidth=0.5 reliefentries=4 polygonreliefangle="45 Angle" airgapwidth=0.5
PolygonConnect Polygon_B.Cu--37_ConnectRelief90 [IsNamedPolygon('B.Cu--37') vs (IsThruPin or IsSMTPin) and (PadShape_AllLayers <> 'Round')] p963: connectstyle=Relief reliefconductorwidth=0.5 reliefentries=4 polygonreliefangle="90 Angle" airgapwidth=0.5
PolygonConnect Polygon_B.Cu--36_ConnectDirect [IsNamedPolygon('B.Cu--36') vs IsVia] p964: connectstyle=Direct reliefconductorwidth=0.254 reliefentries=4 polygonreliefangle="90 Angle" airgapwidth=0.254
PolygonConnect Polygon_B.Cu--36_ConnectRelief45 [IsNamedPolygon('B.Cu--36') vs (IsThruPin or IsSMTPin) and (PadShape_AllLayers = 'Round')] p965: connectstyle=Relief reliefconductorwidth=0.254 reliefentries=4 polygonreliefangle="45 Angle" airgapwidth=0.254
PolygonConnect Polygon_B.Cu--36_ConnectRelief90 [IsNamedPolygon('B.Cu--36') vs (IsThruPin or IsSMTPin) and (PadShape_AllLayers <> 'Round')] p966: connectstyle=Relief reliefconductorwidth=0.254 reliefentries=4 polygonreliefangle="90 Angle" airgapwidth=0.254
PolygonConnect Polygon_B.Cu--35_ConnectDirect [IsNamedPolygon('B.Cu--35') vs IsVia] p967: connectstyle=Direct reliefconductorwidth=0.254 reliefentries=4 polygonreliefangle="90 Angle" airgapwidth=0.254
PolygonConnect Polygon_B.Cu--35_ConnectRelief45 [IsNamedPolygon('B.Cu--35') vs (IsThruPin or IsSMTPin) and (PadShape_AllLayers = 'Round')] p968: connectstyle=Relief reliefconductorwidth=0.254 reliefentries=4 polygonreliefangle="45 Angle" airgapwidth=0.254
PolygonConnect Polygon_B.Cu--35_ConnectRelief90 [IsNamedPolygon('B.Cu--35') vs (IsThruPin or IsSMTPin) and (PadShape_AllLayers <> 'Round')] p969: connectstyle=Relief reliefconductorwidth=0.254 reliefentries=4 polygonreliefangle="90 Angle" airgapwidth=0.254
PolygonConnect Polygon_B.Cu--34_ConnectDirect [IsNamedPolygon('B.Cu--34') vs IsVia] p970: connectstyle=Direct reliefconductorwidth=0.254 reliefentries=4 polygonreliefangle="90 Angle" airgapwidth=0.254
PolygonConnect Polygon_B.Cu--34_ConnectRelief45 [IsNamedPolygon('B.Cu--34') vs (IsThruPin or IsSMTPin) and (PadShape_AllLayers = 'Round')] p971: connectstyle=Relief reliefconductorwidth=0.254 reliefentries=4 polygonreliefangle="45 Angle" airgapwidth=0.254
PolygonConnect Polygon_B.Cu--34_ConnectRelief90 [IsNamedPolygon('B.Cu--34') vs (IsThruPin or IsSMTPin) and (PadShape_AllLayers <> 'Round')] p972: connectstyle=Relief reliefconductorwidth=0.254 reliefentries=4 polygonreliefangle="90 Angle" airgapwidth=0.254
PolygonConnect Polygon_B.Cu--33_ConnectDirect [IsNamedPolygon('B.Cu--33') vs IsVia] p973: connectstyle=Direct reliefconductorwidth=0.254 reliefentries=4 polygonreliefangle="90 Angle" airgapwidth=0.254
PolygonConnect Polygon_B.Cu--33_ConnectRelief45 [IsNamedPolygon('B.Cu--33') vs (IsThruPin or IsSMTPin) and (PadShape_AllLayers = 'Round')] p974: connectstyle=Relief reliefconductorwidth=0.254 reliefentries=4 polygonreliefangle="45 Angle" airgapwidth=0.254
PolygonConnect Polygon_B.Cu--33_ConnectRelief90 [IsNamedPolygon('B.Cu--33') vs (IsThruPin or IsSMTPin) and (PadShape_AllLayers <> 'Round')] p975: connectstyle=Relief reliefconductorwidth=0.254 reliefentries=4 polygonreliefangle="90 Angle" airgapwidth=0.254
PolygonConnect Polygon_B.Cu--32_ConnectDirect [IsNamedPolygon('B.Cu--32') vs IsVia] p976: connectstyle=Direct reliefconductorwidth=0.254 reliefentries=4 polygonreliefangle="90 Angle" airgapwidth=0.254
PolygonConnect Polygon_B.Cu--32_ConnectRelief45 [IsNamedPolygon('B.Cu--32') vs (IsThruPin or IsSMTPin) and (PadShape_AllLayers = 'Round')] p977: connectstyle=Relief reliefconductorwidth=0.254 reliefentries=4 polygonreliefangle="45 Angle" airgapwidth=0.254
PolygonConnect Polygon_B.Cu--32_ConnectRelief90 [IsNamedPolygon('B.Cu--32') vs (IsThruPin or IsSMTPin) and (PadShape_AllLayers <> 'Round')] p978: connectstyle=Relief reliefconductorwidth=0.254 reliefentries=4 polygonreliefangle="90 Angle" airgapwidth=0.254
PolygonConnect Polygon_B.Cu--31_ConnectDirect [IsNamedPolygon('B.Cu--31') vs IsVia] p979: connectstyle=Direct reliefconductorwidth=0.254 reliefentries=4 polygonreliefangle="90 Angle" airgapwidth=0.254
PolygonConnect Polygon_B.Cu--31_ConnectRelief45 [IsNamedPolygon('B.Cu--31') vs (IsThruPin or IsSMTPin) and (PadShape_AllLayers = 'Round')] p980: connectstyle=Relief reliefconductorwidth=0.254 reliefentries=4 polygonreliefangle="45 Angle" airgapwidth=0.254
PolygonConnect Polygon_B.Cu--31_ConnectRelief90 [IsNamedPolygon('B.Cu--31') vs (IsThruPin or IsSMTPin) and (PadShape_AllLayers <> 'Round')] p981: connectstyle=Relief reliefconductorwidth=0.254 reliefentries=4 polygonreliefangle="90 Angle" airgapwidth=0.254
PolygonConnect Polygon_B.Cu--30_ConnectDirect [IsNamedPolygon('B.Cu--30') vs IsVia] p982: connectstyle=Direct reliefconductorwidth=0.254 reliefentries=4 polygonreliefangle="90 Angle" airgapwidth=0.254
PolygonConnect Polygon_B.Cu--30_ConnectRelief45 [IsNamedPolygon('B.Cu--30') vs (IsThruPin or IsSMTPin) and (PadShape_AllLayers = 'Round')] p983: connectstyle=Relief reliefconductorwidth=0.254 reliefentries=4 polygonreliefangle="45 Angle" airgapwidth=0.254
PolygonConnect Polygon_B.Cu--30_ConnectRelief90 [IsNamedPolygon('B.Cu--30') vs (IsThruPin or IsSMTPin) and (PadShape_AllLayers <> 'Round')] p984: connectstyle=Relief reliefconductorwidth=0.254 reliefentries=4 polygonreliefangle="90 Angle" airgapwidth=0.254
PolygonConnect Polygon_B.Cu--29_ConnectDirect [IsNamedPolygon('B.Cu--29') vs IsVia] p985: connectstyle=Direct reliefconductorwidth=0.254 reliefentries=4 polygonreliefangle="90 Angle" airgapwidth=0.254
PolygonConnect Polygon_B.Cu--29_ConnectRelief45 [IsNamedPolygon('B.Cu--29') vs (IsThruPin or IsSMTPin) and (PadShape_AllLayers = 'Round')] p986: connectstyle=Relief reliefconductorwidth=0.254 reliefentries=4 polygonreliefangle="45 Angle" airgapwidth=0.254
PolygonConnect Polygon_B.Cu--29_ConnectRelief90 [IsNamedPolygon('B.Cu--29') vs (IsThruPin or IsSMTPin) and (PadShape_AllLayers <> 'Round')] p987: connectstyle=Relief reliefconductorwidth=0.254 reliefentries=4 polygonreliefangle="90 Angle" airgapwidth=0.254
PolygonConnect Polygon_B.Cu--28_ConnectDirect [IsNamedPolygon('B.Cu--28') vs IsVia] p988: connectstyle=Direct reliefconductorwidth=0.254 reliefentries=4 polygonreliefangle="90 Angle" airgapwidth=0.254
PolygonConnect Polygon_B.Cu--28_ConnectRelief45 [IsNamedPolygon('B.Cu--28') vs (IsThruPin or IsSMTPin) and (PadShape_AllLayers = 'Round')] p989: connectstyle=Relief reliefconductorwidth=0.254 reliefentries=4 polygonreliefangle="45 Angle" airgapwidth=0.254
PolygonConnect Polygon_B.Cu--28_ConnectRelief90 [IsNamedPolygon('B.Cu--28') vs (IsThruPin or IsSMTPin) and (PadShape_AllLayers <> 'Round')] p990: connectstyle=Relief reliefconductorwidth=0.254 reliefentries=4 polygonreliefangle="90 Angle" airgapwidth=0.254
PolygonConnect Polygon_B.Cu--27_ConnectDirect [IsNamedPolygon('B.Cu--27') vs IsVia] p991: connectstyle=Direct reliefconductorwidth=0.254 reliefentries=4 polygonreliefangle="90 Angle" airgapwidth=0.254
PolygonConnect Polygon_B.Cu--27_ConnectRelief45 [IsNamedPolygon('B.Cu--27') vs (IsThruPin or IsSMTPin) and (PadShape_AllLayers = 'Round')] p992: connectstyle=Relief reliefconductorwidth=0.254 reliefentries=4 polygonreliefangle="45 Angle" airgapwidth=0.254
PolygonConnect Polygon_B.Cu--27_ConnectRelief90 [IsNamedPolygon('B.Cu--27') vs (IsThruPin or IsSMTPin) and (PadShape_AllLayers <> 'Round')] p993: connectstyle=Relief reliefconductorwidth=0.254 reliefentries=4 polygonreliefangle="90 Angle" airgapwidth=0.254
PolygonConnect Polygon_B.Cu--26_ConnectDirect [IsNamedPolygon('B.Cu--26') vs IsVia] p994: connectstyle=Direct reliefconductorwidth=0.254 reliefentries=4 polygonreliefangle="90 Angle" airgapwidth=0.254
PolygonConnect Polygon_B.Cu--26_ConnectRelief45 [IsNamedPolygon('B.Cu--26') vs (IsThruPin or IsSMTPin) and (PadShape_AllLayers = 'Round')] p995: connectstyle=Relief reliefconductorwidth=0.254 reliefentries=4 polygonreliefangle="45 Angle" airgapwidth=0.254
PolygonConnect Polygon_B.Cu--26_ConnectRelief90 [IsNamedPolygon('B.Cu--26') vs (IsThruPin or IsSMTPin) and (PadShape_AllLayers <> 'Round')] p996: connectstyle=Relief reliefconductorwidth=0.254 reliefentries=4 polygonreliefangle="90 Angle" airgapwidth=0.254
PolygonConnect Polygon_B.Cu--25_ConnectDirect [IsNamedPolygon('B.Cu--25') vs IsVia] p997: connectstyle=Direct reliefconductorwidth=0.254 reliefentries=4 polygonreliefangle="90 Angle" airgapwidth=0.254
PolygonConnect Polygon_B.Cu--25_ConnectRelief45 [IsNamedPolygon('B.Cu--25') vs (IsThruPin or IsSMTPin) and (PadShape_AllLayers = 'Round')] p998: connectstyle=Relief reliefconductorwidth=0.254 reliefentries=4 polygonreliefangle="45 Angle" airgapwidth=0.254
PolygonConnect Polygon_B.Cu--25_ConnectRelief90 [IsNamedPolygon('B.Cu--25') vs (IsThruPin or IsSMTPin) and (PadShape_AllLayers <> 'Round')] p999: connectstyle=Relief reliefconductorwidth=0.254 reliefentries=4 polygonreliefangle="90 Angle" airgapwidth=0.254
PolygonConnect Polygon_B.Cu--24_ConnectDirect [IsNamedPolygon('B.Cu--24') vs IsVia] p1000: connectstyle=Direct reliefconductorwidth=0.254 reliefentries=4 polygonreliefangle="90 Angle" airgapwidth=0.254
PolygonConnect Polygon_B.Cu--24_ConnectRelief45 [IsNamedPolygon('B.Cu--24') vs (IsThruPin or IsSMTPin) and (PadShape_AllLayers = 'Round')] p1001: connectstyle=Relief reliefconductorwidth=0.254 reliefentries=4 polygonreliefangle="45 Angle" airgapwidth=0.254
PolygonConnect Polygon_B.Cu--24_ConnectRelief90 [IsNamedPolygon('B.Cu--24') vs (IsThruPin or IsSMTPin) and (PadShape_AllLayers <> 'Round')] p1002: connectstyle=Relief reliefconductorwidth=0.254 reliefentries=4 polygonreliefangle="90 Angle" airgapwidth=0.254
PolygonConnect Polygon_B.Cu--23_ConnectDirect [IsNamedPolygon('B.Cu--23') vs IsVia] p1003: connectstyle=Direct reliefconductorwidth=0.254 reliefentries=4 polygonreliefangle="90 Angle" airgapwidth=0.254
PolygonConnect Polygon_B.Cu--23_ConnectRelief45 [IsNamedPolygon('B.Cu--23') vs (IsThruPin or IsSMTPin) and (PadShape_AllLayers = 'Round')] p1004: connectstyle=Relief reliefconductorwidth=0.254 reliefentries=4 polygonreliefangle="45 Angle" airgapwidth=0.254
PolygonConnect Polygon_B.Cu--23_ConnectRelief90 [IsNamedPolygon('B.Cu--23') vs (IsThruPin or IsSMTPin) and (PadShape_AllLayers <> 'Round')] p1005: connectstyle=Relief reliefconductorwidth=0.254 reliefentries=4 polygonreliefangle="90 Angle" airgapwidth=0.254
PolygonConnect Polygon_B.Cu--22_ConnectDirect [IsNamedPolygon('B.Cu--22') vs IsVia] p1006: connectstyle=Direct reliefconductorwidth=0.254 reliefentries=4 polygonreliefangle="90 Angle" airgapwidth=0.254
PolygonConnect Polygon_B.Cu--22_ConnectRelief45 [IsNamedPolygon('B.Cu--22') vs (IsThruPin or IsSMTPin) and (PadShape_AllLayers = 'Round')] p1007: connectstyle=Relief reliefconductorwidth=0.254 reliefentries=4 polygonreliefangle="45 Angle" airgapwidth=0.254
PolygonConnect Polygon_B.Cu--22_ConnectRelief90 [IsNamedPolygon('B.Cu--22') vs (IsThruPin or IsSMTPin) and (PadShape_AllLayers <> 'Round')] p1008: connectstyle=Relief reliefconductorwidth=0.254 reliefentries=4 polygonreliefangle="90 Angle" airgapwidth=0.254